# Altium PCB 船主控pcb.pcbdoc
Units mil, origin at the board's own origin, x right, y up, seen from the top; angles counter-clockwise.
Board outline 4146.85 x 4589.53 mil, 2 copper layers (Top Layer, Bottom Layer); 123 components, 77 nets, 392 pads, 117 vias.
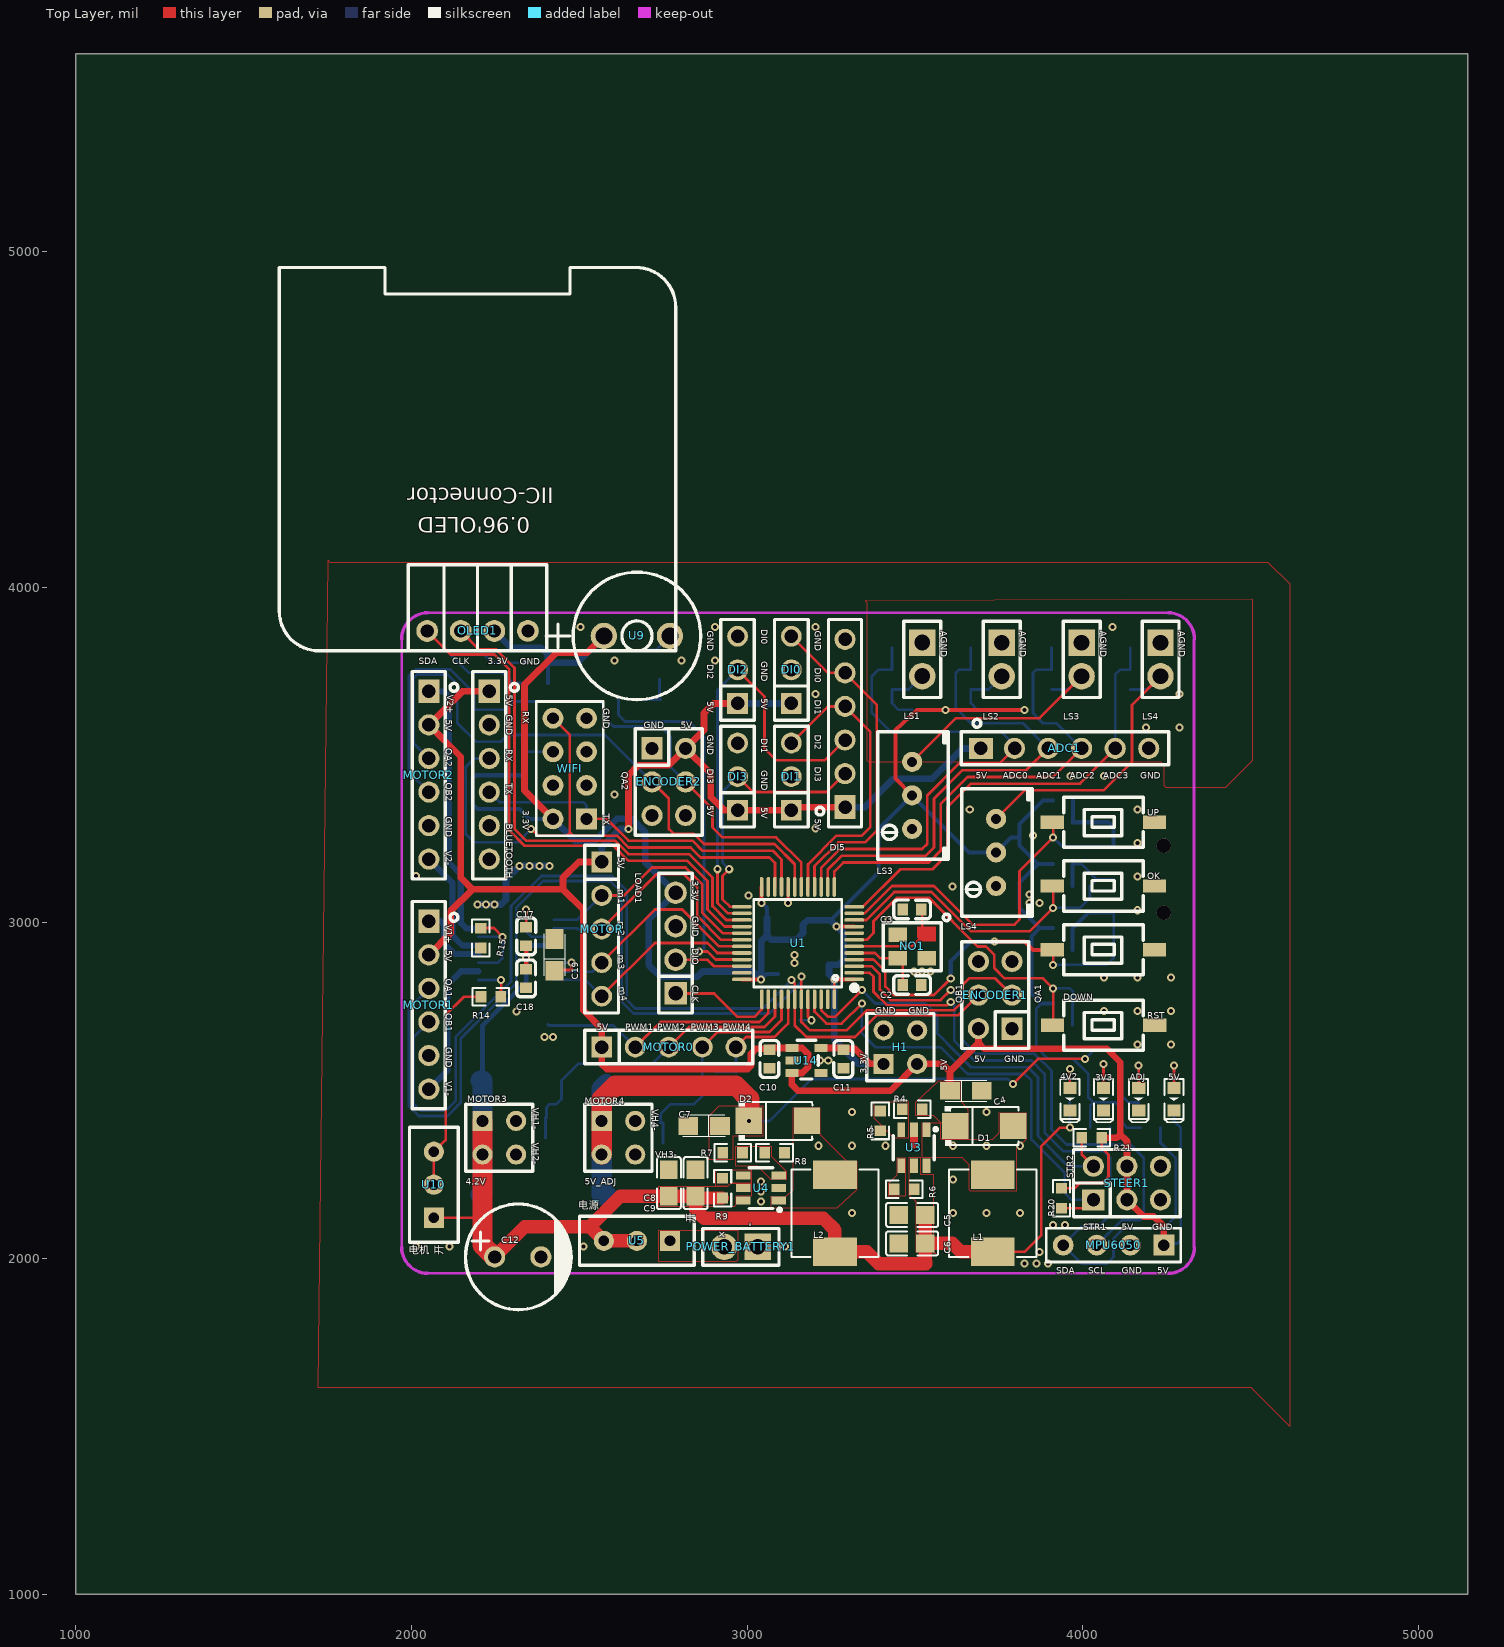
[diagram p0: Top Layer view]
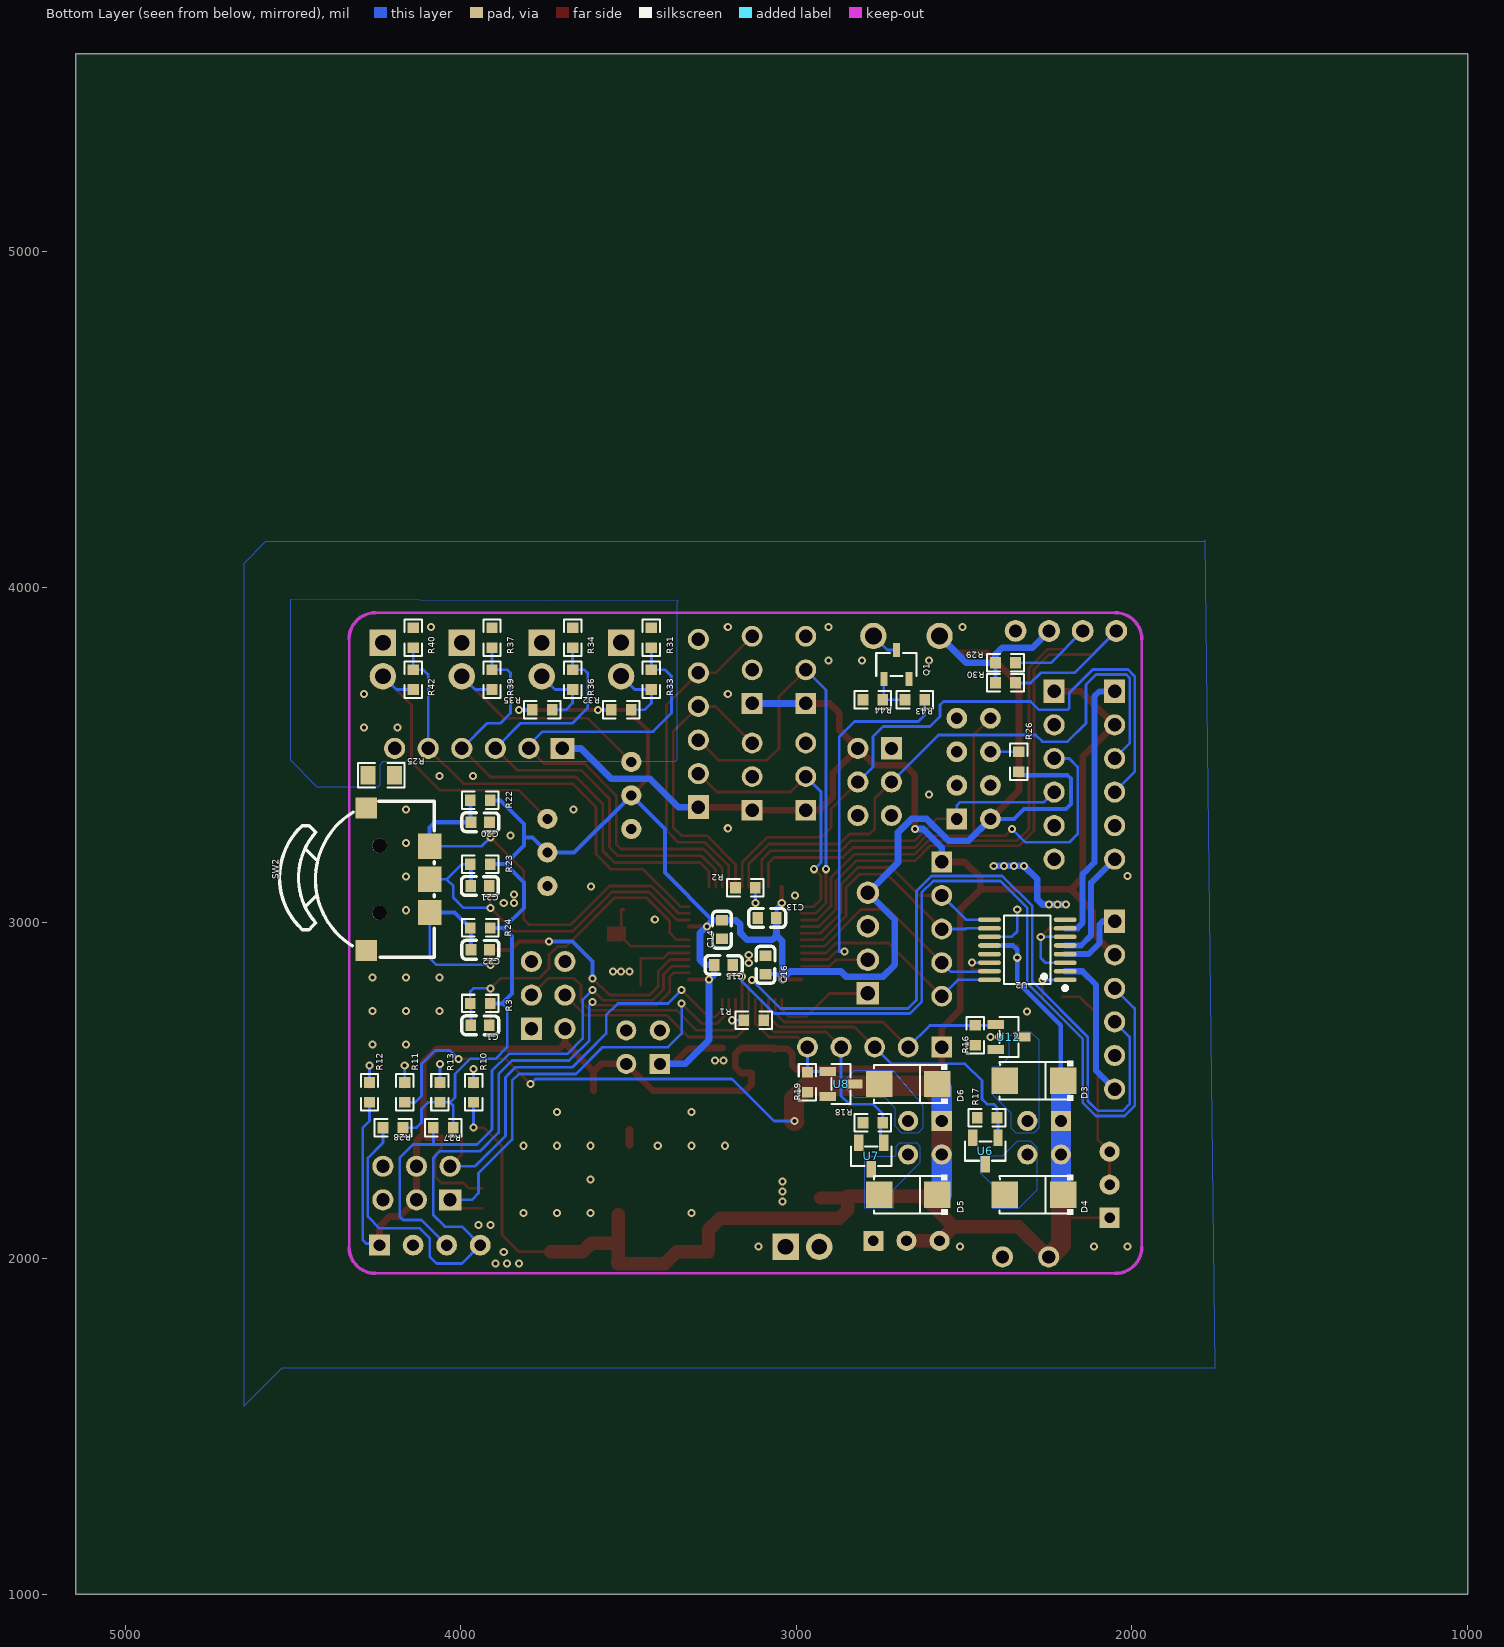
[diagram p1: Bottom Layer view, seen from below]

## Layer stack, top to bottom
Top Layer: signal copper (thickness not stored)
Dielectric: dielectric 12.6, FR-4, Dk 4.8
Bottom Layer: signal copper (thickness not stored)

## Board outline
5146.85,1000 1000,1000 1000,5589.53 5146.85,5589.53

## Components (designator, comment, footprint, x,y, rotation, side; value= is the part's Value field where it differs from the comment)
3V3 "LED-0603_R" LED0603_RED 4061.85,2475 r270 top
4V2 "LED-0603_R" LED0603_RED 3961.85,2475 r270 top
5V "LED-0603_R" LED0603_RED 4271.85,2475 r270 top
ADC1 "HDR-F_2.54_1x6P" HDR-TH_6P-P2.54-V-F 3946.85,3520 r0 top
ADJ "LED-0603_R" LED0603_RED 4166.85,2475 r270 top
BLUETOOTH "HDR-F_2.54_1x6P" HDR-TH_6P-P2.54-V-F 2231.85,3440 r270 top
C1 "100nF" C0603#1 3942.04,2695 r180 bottom
C2 "100nF" C0603#2 3491.24,2815 r180 top
C3 "100nF" C0603#2 3491.85,3040 r0 top
C4 "22uF" CASE-A_3216 3651.85,2500 r0 top
C5 "10uF" C0805 3491.85,2130 r180 top
C6 "10uF" C0805 3491.85,2045 r180 top
C7 "22uF" CASE-A_3216 2871.85,2395 r180 top
C8 "10uF" C0805 2846.85,2225 r90 top
C9 "10uF" C0805 2766.85,2225 r90 top
C10 "1uF" C0603#2 3066.85,2595 r90 top
C11 "1uF" C0603#2 3286.85,2595 r90 top
C12 "1000uF" CAP-TH_BD8.0-P3.50-D0.6-FD 2316.85,2005 r0 top
C13 "100nF" C0603#1 3086.85,3015 r0 bottom
C14 "100nF" C0603#1 3221.85,2980 r270 bottom
C15 "100nF" C0603#1 3216.85,2875 r180 bottom
C16 "100nF" C0603#1 3091.85,2875 r90 bottom
C17 "10nF" C0603#2 2341.85,2960 r270 top
C18 "10uF" C0603#2 2341.85,2835 r90 top
C19 "22uF" CASE-A_3216 2426.85,2905 r90 top
C20 "100nF" C0603#1 3941.85,3300 r180 bottom
C21 "100nF" C0603#1 3942.46,3110 r0 bottom
C22 "100nF" C0603#1 3941.85,2920 r180 bottom
D1 "SS14" SMA_L4.3-W2.6-LS5.2-RD#1 3706.85,2395 r0 top
D2 "SS14" SMA_L4.3-W2.6-LS5.2-RD#1 3091.85,2410 r0 top
D3 "SS14" SMA_L4.3-W2.6-LS5.2-RD#2 2291.85,2530 r180 bottom
D4 "SS14" SMA_L4.3-W2.6-LS5.2-RD#2 2291.85,2190 r180 bottom
D5 "SS14" SMA_L4.3-W2.6-LS5.2-RD#2 2666.85,2190 r180 bottom
D6 "SS14" SMA_L4.3-W2.6-LS5.2-RD#2 2666.85,2520 r180 bottom
DI0 "HDR-F_2.54_1x3P" HDR-TH_3P-P2.54-V-F 3131.85,3754.05 r90 top
DI1 "HDR-F_2.54_1x3P" HDR-TH_3P-P2.54-V-F 3131.85,3435.95 r90 top
DI2 "HDR-F_2.54_1x3P" HDR-TH_3P-P2.54-V-F 2971.85,3754.05 r90 top
DI3 "HDR-F_2.54_1x3P" HDR-TH_3P-P2.54-V-F 2971.85,3435.95 r90 top
DI5 "HDR-F_2.54_1x6P" HDR-TH_6P-P2.54-V-F 3291.85,3595 r90 top
DOWN "微动开关贴片" SW-SMD_L6.0-W3.7-LS8.0 4061.85,2920 r0 top
ENCODER1 "HDR-F_2.54_2x3" HDR-TH_6P-P2.54-V-F-R2-C3-S2.54 3739.45,2785 r90 top
ENCODER2 "HDR-F_2.54_2x3" HDR-TH_6P-P2.54-V-F-R2-C3-S2.54 2766.85,3420 r270 top
H1 "HDR-F-2.54_2x2" HDR-F-2.54_2X2 3456.86,2630 r0 top
L1 "47uH" IND-SMD_L7.1-W6.6 3731.85,2135 r270 top
L2 "47uH" IND-SMD_L7.1-W6.6 3261.85,2135 r270 top
LOAD1 "HDR-F_2.54_1x4P" HDR-TH_4P-P2.54-V-F 2786.85,2940 r90 top
LS1 "HDR-F_2.54_1x2P" HDR-TH_2P-P2.54-V-F 3522.04,3785.2 r270 top
LS2 "HDR-F_2.54_1x2P" HDR-TH_2P-P2.54-V-F 3758.65,3785 r270 top
LS3 "HDR-F_2.54_1x2P" HDR-TH_2P-P2.54-V-F 3996.85,3785 r270 top
LS3 "3296W-2K" RES-ADJ-TH_3296W 3491.85,3380 r180 top
LS4 "3296W-2K" RES-ADJ-TH_3296W 3741.85,3210 r180 top
LS4 "HDR-F_2.54_1x2P" HDR-TH_2P-P2.54-V-F 4231.85,3785 r270 top
MOTOR "HDR-F_2.54_1x5P" HDR-TH_5P-P2.54-V-F 2566.85,2981.73 r270 top
MOTOR0 "HDR-F_2.54_1x5P" HDR-TH_5P-P2.54-V-F 2766.85,2630 r0 top
MOTOR1 "HDR-F_2.54_1x6P" HDR-TH_6P-P2.54-V-F 2051.85,2755 r270 top
MOTOR2 "HDR-F_2.54_1x6P" HDR-TH_6P-P2.54-V-F 2051.85,3440 r270 top
MOTOR3 "HDR-F-2.54_2x2" HDR-F-2.54_2X2 2261.85,2360 r270 top
MOTOR4 "HDR-F-2.54_2x2" HDR-F-2.54_2X2 2616.85,2360 r270 top
MPU6050 "HDR-F-2.54_1x4" HDR-F-2.54_1X4 4091.85,2040 r180 top
NO1 "8MHz" 3225G-4P晶振 3491.85,2930 r180 top
OK "微动开关贴片" SW-SMD_L6.0-W3.7-LS8.0 4061.85,3110 r0 top
OLED1 "0.96OLED模块_4P" 0.96OLED_4P 2196.85,3870 r180 top
POWER_BATTERY1 "HDR-F_2.54_1x2P" HDR-TH_2P-P2.54-V-F 2981.85,2035 r180 top
Q1 "S8050H" SOT-23-3_L3.0-W1.7-P0.95-LS2.9-BR 2701.85,3770 r90 bottom
R1 "10K" R0603#1 3126.85,2710 r0 bottom
R2 "10K" R0603#1 3151.85,3105 r0 bottom
R3 "10K" R0603#1 3941.66,2760 r0 bottom
R4 "3K" R0603#2 3491.85,2445 r0 top
R5 "2K" R0603#2 3396.85,2410 r270 top
R6 "10K" R0603#2 3468.38,2205.96 r180 top
R7 "1K" R0603#2 2956.85,2315 r180 top
R8 "3K" R0603#2 3081.85,2315 r0 top
R9 "10K" R0603#2 2926.85,2210 r90 top
R10 "4.7K" R0603#1 3961.85,2495 r90 bottom
R11 "4.7K" R0603#1 4166.85,2495 r90 bottom
R12 "4.7K" R0603#1 4271.85,2495 r90 bottom
R13 "4.7K" R0603#1 4061.85,2495 r90 bottom
R14 "20K" R0603#2 2236.85,2780 r180 top
R15 "0.2R" R0603#2 2206.85,2955 r90 top
R16 "10K" R0603#1 2466.85,2665 r270 bottom
R17 "10K" R0603#1 2431.85,2420 r0 bottom
R18 "10K" R0603#1 2771.85,2405 r0 bottom
R19 "10K" R0603#1 2966.85,2525 r270 bottom
R20 "1K" R0603#2 3936.85,2180 r90 top
R21 "1K" R0603#2 4026.85,2360 r0 top
R22 "10K" R0603#1 3941.66,3365 r0 bottom
R23 "10K" R0603#1 3941.66,3175 r0 bottom
R24 "10K" R0603#1 3941.66,2985 r0 bottom
R25 "0" R0805 4236.85,3440 r0 bottom
R26 "4.7K" R0603#1 2336.85,3480 r90 bottom
R27 "4.7K" R0603#1 4051.85,2390 r180 bottom
R28 "4.7K" R0603#1 4201.85,2390 r180 bottom
R29 "4.7K" R0603#1 2376.85,3775 r0 bottom
R30 "4.7K" R0603#1 2376.85,3715 r0 bottom
R31 "1K" R0603#1 3431.85,3850 r90 bottom
R32 "47K" R0603#1 3521.85,3635 r0 bottom
R33 "1K" R0603#1 3431.85,3725 r270 bottom
R34 "1K" R0603#1 3666.85,3850 r90 bottom
R35 "47K" R0603#1 3756.85,3635 r0 bottom
R36 "1K" R0603#1 3666.85,3725 r270 bottom
R37 "1K" R0603#1 3906.85,3850 r90 bottom
R39 "1K" R0603#1 3906.85,3725 r270 bottom
R40 "1K" R0603#1 4141.85,3850 r90 bottom
R42 "1K" R0603#1 4141.85,3725 r270 bottom
R43 "1K" R0603#1 2646.85,3665 r180 bottom
R44 "1K" R0603#1 2771.85,3665 r0 bottom
RST "微动开关贴片" SW-SMD_L6.0-W3.7-LS8.0 4062.04,2695 r0 top
STEER1 "HDR-F_2.54_2x3" HDR-TH_6P-P2.54-V-F-R2-C3-S2.54 4131.85,2225 r0 top
SW2 "K1-1502SA-02" KEY-SMD_K1-1502SA-02 4186.85,3130 r270 bottom
U1 "STM32F103C8T6" LQFP-48_L7.0-W7.0-P0.50-LS9.0-BL 3151.85,2940 r90 top
U2 "DRV8833PW_C3681295" TSSOP-16_L5.0-W4.4-P0.65-LS6.4-BL 2311.85,2920 r270 bottom
U3 "SX1308" SOT-23-6_L2.9-W1.6-P0.95-LS2.8-BR 3496.86,2329.99 r90 top
U4 "SX1308" SOT-23-6_L2.9-W1.6-P0.95-LS2.8-BR 3041.85,2210 r0 top
U5 "KH-SS12D01-G3-5.0" SW-TH_KH-SS12D01-G3-5.0 2671.85,2052.72 r180 top
U6 "AO3416" SOT-23-3_L2.9-W1.3-P1.90-LS2.4-BR 2436.85,2320 r270 bottom
U7 "AO3416" SOT-23-3_L2.9-W1.3-P1.90-LS2.4-BR 2776.85,2305 r270 bottom
U8 "AO3416" SOT-23-3_L2.9-W1.3-P1.90-LS2.4-BR 2866.85,2520 r180 bottom
U9 "3.3V 小蜂鸣器" 3.3V小蜂鸣器 2671.85,3855 r90 top
U10 "KH-SS12D01-G3-5.0" SW-TH_KH-SS12D01-G3-5.0 2066.85,2220 r90 top
U12 "AO3416" SOT-23-3_L2.9-W1.3-P1.90-LS2.4-BR 2366.85,2660 r180 bottom
U14 "TPRT9013" SOT-23-5_L2.9-W1.6-P0.95-LS2.8-BL 3176.85,2590 r270 top
UP "微动开关贴片" SW-SMD_L6.0-W3.7-LS8.0 4061.85,3300 r0 top
WIFI "HDR-M-2.54_2x4" HDR-M-2.54_2X4 2471.85,3460 r90 top

## Footprints (in the part's own frame and the unit in brackets; to place one, negate y for a bottom-side part, rotate by r counter-clockwise, add the part's x,y. Pads: shape width x height; smd on the part's side, far side on the other; paste and mask are expansions set on the pad)
0.96OLED_4P [mm]
  round 1.65 hole 1 paste+0 mask+0.051: 1(-3.81,-0.001) 2(-1.27,0.002) 3(1.27,0.002) 4(3.81,0.002)
  silkscreen extent -15,-27.5 15,1.5
3.3V小蜂鸣器 [mm]
  round 2 hole 1.3 paste+0 mask+0.102: 1(0,2.5) 2(0,-2.5)
  silkscreen extent -4.82,-4.83 4.82,6.86
3225G-4P晶振 [mm]
  rect 1.4x1.1 smd paste+0 mask+0.102: 2(1.1,-0.9) 3(1.1,0.9) 4(-1.1,0.9)
  Top Layer region: -1.8,-0.4 -0.7,-0.4 -0.4,-0.7 -0.4,-1.5 -1.8,-1.5
  silkscreen extent -2.85,-2.45 2.2,1.85
C0603#1 [mm]
  rect 0.8x0.9 smd paste+0 mask+0.051: 1(0.7,0) 2(-0.7,0)
  silkscreen extent -1.39,-0.72 1.41,0.71
C0603#2 [mm]
  rect 0.8x0.9 smd paste+0 mask+0.051: 1(-0.7,0) 2(0.7,0)
  silkscreen extent -1.41,-0.71 1.39,0.72
C0805 [mm]
  rect 1.41x1.35 smd paste-100 mask+0.051: 1(-1,0) 2(1,0)
  silkscreen extent -1.96,-0.9 1.96,0.9
CAP-TH_BD8.0-P3.50-D0.6-FD [mm]
  round 1.6 hole 1 paste+0 mask+0.051: 1(-1.75,0) 2(1.75,0)
  silkscreen extent -3.96,-4 4.04,4
CASE-A_3216 [mil]
  rect 59.05x53.5 smd paste+0 mask+2: 1(-47.25,0) 2(47.24,0)
  silkscreen extent -63,-32 63,32
HDR-F-2.54_1X4 [mil]
  rect 62x62 hole 35 paste+0 mask+2: 1(-150,0)
  round 62 hole 35 paste+0 mask+2: 2(-50,0) 3(50,0) 4(150,0)
  silkscreen extent -200,-50 200,50
HDR-F-2.54_2X2 [mil]
  rect 60x60 hole 36 paste+0 mask+2: 1(-50,-50)
  round 60 hole 36 paste+0 mask+2: 2(-50,50) 3(50,-50) 4(50,50)
  silkscreen extent -100,-100 100,100
HDR-M-2.54_2X4 [mil]
  rect 62x62 hole 35 paste+0 mask+2: 1(-150,-50)
  round 62 hole 35 paste+0 mask+2: 2(-150,50) 3(-50,-50) 4(-50,50) 5(50,-50) 6(50,50) 7(150,-50) 8(150,50)
  silkscreen extent -200,-100 200,100
HDR-TH_2P-P2.54-V-F [mm]
  rect 2x2 hole 1.2 paste+0 mask+0.051: 1(-1.27,0)
  round 2 hole 1.2 paste+0 mask+0.051: 2(1.27,0)
  silkscreen extent -2.88,-1.39 2.88,1.4
HDR-TH_3P-P2.54-V-F [mil]
  rect 62x62 hole 40.16 paste+0 mask+2: 1(-100,0)
  round 62 hole 40.16 paste+0 mask+2: 2(0,0) 3(100,0)
  silkscreen extent -150,-50 150,50
HDR-TH_4P-P2.54-V-F [mm]
  rect 1.7x1.7 hole 1.1 paste+0 mask+0.051: 1(-3.81,0)
  round 1.7 hole 1.1 paste+0 mask+0.051: 2(-1.27,0) 3(1.27,0) 4(3.81,0)
  silkscreen extent -5.29,-1.27 5.29,1.27
HDR-TH_5P-P2.54-V-F [mil]
  rect 62x62 hole 40.16 paste+0 mask+2: 1(-200,0)
  round 62 hole 40.16 paste+0 mask+2: 2(-100,0) 3(0,0) 4(100,0) 5(200,0)
  silkscreen extent -250,-50 250,50
HDR-TH_6P-P2.54-V-F [mm]
  rect 1.8x1.6 hole 1.02 paste+0 mask+0.051: 1(-6.35,0)
  round 1.6 hole 1.02 paste+0 mask+0.051: 2(-3.81,0) 3(-1.27,0) 4(1.27,0) 5(3.81,0) 6(6.35,0)
  silkscreen extent -7.85,-1.25 7.85,2.2
HDR-TH_6P-P2.54-V-F-R2-C3-S2.54 [mm]
  rect 1.7x1.6 hole 1 paste+0 mask+0.051: 1(-2.54,-1.27)
  round 1.6 hole 1 paste+0 mask+0.051: 2(-2.54,1.27) 3(0,-1.27) 4(0,1.27) 5(2.54,-1.27) 6(2.54,1.27)
  silkscreen extent -4.04,-2.54 4.04,2.54
IND-SMD_L7.1-W6.6 [mm]
  rect 2.15x3.32 smd paste+0 mask+0.051: 1(-2.913,0) 2(2.913,0)
  silkscreen extent -3.3,-3.3 3.3,3.3
KEY-SMD_K1-1502SA-02 [mm]
  rect 1.9x1.8 smd paste+0 mask+0.051: 1(2.5,2.4) 2(-2.5,2.4) T(0,2.4)
  rect 1.6x1.6 smd paste+0 mask+0.051: 3(5.4,-2.4) C(-5.4,-2.4)
  round 1.1 hole 1.1 unplated paste+0: ""(-2.54,-1.4) ""(2.54,-1.4)
  silkscreen extent -5.9,-8.97 5.9,2.75
LED0603_RED [mm]
  rect 0.9x1 smd paste+0 mask+0.051: 1(-0.85,0) 2(0.85,0)
  silkscreen extent -1.54,-0.73 1.75,0.73
LQFP-48_L7.0-W7.0-P0.50-LS9.0-BL [mm]
  oval 0.27x1.5 smd paste+0 mask+0.05: 1(-2.75,-4.25) 2(-2.25,-4.25) 3(-1.75,-4.25) 4(-1.25,-4.25) 5(-0.75,-4.25) 6(-0.25,-4.25) 7(0.25,-4.25) 8(0.75,-4.25) 9(1.25,-4.25) 10(1.75,-4.25) 11(2.25,-4.25) 12(2.75,-4.25) 25(2.75,4.25) 26(2.25,4.25) 27(1.75,4.25) 28(1.25,4.25) 29(0.75,4.25) 30(0.25,4.25) 31(-0.25,4.25) 32(-0.75,4.25) 33(-1.25,4.25) 34(-1.75,4.25) 35(-2.25,4.25) 36(-2.75,4.25)
  oval 1.5x0.27 smd paste+0 mask+0.05: 13(4.25,-2.75) 14(4.25,-2.25) 15(4.25,-1.75) 16(4.25,-1.25) 17(4.25,-0.75) 18(4.25,-0.25) 19(4.25,0.25) 20(4.25,0.75) 21(4.25,1.25) 22(4.25,1.75) 23(4.25,2.25) 24(4.25,2.75) 37(-4.25,2.75) 38(-4.25,2.25) 39(-4.25,1.75) 40(-4.25,1.25) 41(-4.25,0.75) 42(-4.25,0.25) 43(-4.25,-0.25) 44(-4.25,-0.75) 45(-4.25,-1.25) 46(-4.25,-1.75) 47(-4.25,-2.25) 48(-4.25,-2.75)
  silkscreen extent -3.59,-4.46 3.3,3.34
R0603#1 [mil]
  rect 31.75x34.02 smd paste-3937.01 mask+2: 1(29.65,0) 2(-29.66,0)
  silkscreen extent -55,-26 55,26
R0603#2 [mil]
  rect 31.75x34.02 smd paste-3937.01 mask+2: 1(-29.66,0) 2(29.65,0)
  silkscreen extent -55,-26 55,26
R0805 [mil]
  rect 44.59x54.21 smd paste-3937.01 mask+2: 1(39.37,0) 2(-39.37,0)
  silkscreen extent -69,-36 69,36
RES-ADJ-TH_3296W [mil]
  round 60 hole 30 paste+0 mask+2: 1(0,100.01) 2(0,0.01) 3(0,-99.99)
  silkscreen extent -108,-190 102,190
SMA_L4.3-W2.6-LS5.2-RD#1 [mm]
  rect 2x2 smd paste+0 mask+0.051: 1(-2.2,0) 2(2.2,0)
  silkscreen extent -2.98,-1.5 2.6,1.5
SMA_L4.3-W2.6-LS5.2-RD#2 [mm]
  rect 2x2 smd paste+0 mask+0.051: 1(2.2,0) 2(-2.2,0)
  silkscreen extent -2.6,-1.5 2.98,1.5
SOT-23-3_L2.9-W1.3-P1.90-LS2.4-BR [mm]
  rect 1.25x0.7 smd paste+0 mask+0.051: 1(-1,0.95) 2(-1,-0.95) 3(1,0)
  silkscreen extent -0.73,-1.53 0.73,1.53
SOT-23-3_L3.0-W1.7-P0.95-LS2.9-BR [mm]
  rect 1.037x0.532 smd paste+0 mask+0.051: 1(-1.101,0.95) 2(-1.101,-0.95) 3(1.101,0)
  silkscreen extent -0.86,-1.53 0.86,1.53
SOT-23-5_L2.9-W1.6-P0.95-LS2.8-BL [mm]
  rect 0.6x1 smd paste+0 mask+0.05: 1(-0.95,-1.1) 2(0,-1.1) 3(0.95,-1.1) 4(0.95,1.1) 5(-0.95,1.1)
  silkscreen extent -1.52,-0.7 1.4,0.89
SOT-23-6_L2.9-W1.6-P0.95-LS2.8-BR [mm]
  rect 1.1x0.6 smd paste+0 mask+0.051: 1(1.35,-0.95) 2(1.35,0) 3(1.35,0.95) 4(-1.35,0.95) 5(-1.35,0) 6(-1.35,-0.95)
  silkscreen extent -0.9,-1.78 1.52,1.55
SW-SMD_L6.0-W3.7-LS8.0 [mm]
  rect 1.75x1 smd paste+0 mask+0.051: 1(-3.875,0) 2(3.875,0)
  silkscreen extent -3,-1.9 3,1.9
SW-TH_KH-SS12D01-G3-5.0 [mil]
  rect 60x60 hole 31.5 paste+0 mask+2: 1(-98.43,0)
  round 60 hole 31.5 paste+0 mask+2: 2(0,0) 3(98.42,0)
  silkscreen extent -171,-73 171,73
TSSOP-16_L5.0-W4.4-P0.65-LS6.4-BL [mm]
  oval 0.343x1.731 smd paste+0 mask+0.051: 1(2.275,2.866) 2(1.625,2.866) 3(0.975,2.866) 4(0.325,2.866) 5(-0.325,2.866) 6(-0.975,2.866) 7(-1.625,2.866) 8(-2.275,2.866) 9(-2.275,-2.866) 10(-1.625,-2.866) 11(-0.975,-2.866) 12(-0.325,-2.866) 13(0.325,-2.866) 14(0.975,-2.866) 15(1.625,-2.866) 16(2.275,-2.866)
  silkscreen extent -2.58,-1.77 3.05,3.02

## Via types
v1: diameter 24, hole 12, Top Layer to Bottom Layer, tented both sides, 117 vias

## Nets (pads, with @x,y where several pads share a name; then routed paths per layer and width w, separated by ;. In a path a pad name is that pad's centre, name@x,y a point inside that pad or via, vN(x,y) a via of type N, cw(c..) or ccw(c..) an arc to the next point about the centre after c; other vN are vias at no path point)
3.3V: C11.2 C13.2 C14.2 C15.2 C16.2 H1.1 LOAD1.4 LS3.2@3491.85,3379.99 LS4.2@3741.85,3209.99 OLED1.2 R3.2 R13.2 R22.2 R23.2 R24.2 R26.2 R27.1 R28.1 R29.1 R30.1 R32.1 R35.1 U1.1 U1.9 U1.24 U1.36 U1.48 U9.1 U14.5 WIFI.2 | length 7644.4
  Top Layer w8: U1.48 v1(3260.15,2831.7)
  Top Layer w12: U1.36 v1(3041.85,2831.7) ; v1(3043.55,3060) U1.24@3043.55,3107.3 ; v1(3260.15,2831.7) U1.1@3319.15,2831.7 ; v1(3266.85,2990) 3318.38,2990 U1.9 ; LS3.2@3491.85,3380 3441.85,3430 3441.85,3575 3506.85,3635 v1(3591.15,3635) v1(3826.85,3635)
  Top Layer w20: WIFI.2 2336.85,3395 2336.85,3710 2431.85,3805 2523.45,3805 U9.1 ; U14.5@3220.15,2627.4 3286.85,2627.4 C11.2 3289.25,2625 3321.85,2625 3366.85,2580 H1.1@3406.85,2580
  Bottom Layer w8: 3876.85,2760 3861.85,2745 3861.85,2630 3896.85,2595 3971.85,2595 4016.85,2550 4016.85,2480 4031.85,2465 ; R27.1@4022.15,2390 4022.15,2455.3 4031.85,2465 ; R28.1@4172.15,2390 4131.85,2390 4116.85,2405 4116.85,2445 4096.85,2465 R13.2 4031.85,2465
  Bottom Layer w12: R26.2 2336.85,3440 2191.85,3440 2181.85,3430 2181.85,3355 2196.85,3340 2321.85,3340 2351.85,3310 WIFI.2 ; R30.1 R29.1 ; v1(3041.85,2831.7) 3057.59,2847.44 C16.2 ; v1(3043.55,3060) 3059.29,3044.26 C13.2 ; 3249.25,3007.6 3391.85,3150.1 3391.85,3280 3491.85,3380 3661.85,3210 3741.85,3210 3786.32,3254.48 ; R32.1 v1(3591.15,3635) ; 3786.35,3254.5 3811.85,3254.3 ; R35.1 v1(3826.85,3635) ; R3.2@3911.95,2760 3876.85,2760 3846.85,2790 3846.85,2960 3871.85,2985 ; R24.2@3911.95,2985 3871.85,2985 ; R23.2@3911.95,3175 3866.85,3175 ; R22.2@3911.95,3365 3881.85,3365 3811.85,3295 3811.85,3230 3866.85,3175 ; 3866.85,3175 3811.85,3120 3811.85,3045 3871.85,2985
  Bottom Layer w20: OLED1.2@2246.85,3869.95 2296.8,3820 2386.85,3820 2406.51,3800.34 R29.1 2493.43,3775 U9.1 ; WIFI.2 2486.85,3245 2546.85,3245 2611.85,3310 2656.85,3310 2696.85,3270 2696.85,3180 LOAD1.4 2706.85,3010 2706.85,2875 2741.85,2840 2851.85,2840 2866.85,2855 3018.55,2855 v1(3041.85,2831.7) 3041.85,2945 3059.25,2962.4 ; C13.2@3059.25,3015 3059.25,2962.4 ; C15.2 3244.41,2847.44 v1(3260.15,2831.7) 3260.15,2651.7 3331.85,2580 H1.1 ; C15.2 3271.85,2875 3286.85,2890 3286.85,2970 v1(3266.85,2990) 3249.29,3007.56 C14.2 3179.41,3007.56 3166.85,2995 3166.85,2970 3146.85,2950 3071.65,2950 3059.25,2962.4
4.2V: C5.1 C6.1 C8.1 C9.1 C12.1 C17.2 C18.2 D3.1 D4.1 L1.2 L2.2 MOTOR3.1 MOTOR3.3 R6.1 R9.1 R10.2 U2.12 U3.5 U4.5 U5.2 U5.3 U10.1 | length 4354.3
  Top Layer w8: U10.1 2211.85,2121.3 ; L1.2 3732.17,2020 3826.85,2020 3876.85,2070 3876.85,2335 3931.85,2390 v1(3961.85,2390)
  Top Layer w14: C18.2 v1(2341.85,2896.32) C17.2
  Top Layer w40: C12.1 2337.95,2095 2531.15,2095 ; U5.3 U5.2 ; U5.3 2531.15,2095 ; C9.1 2621.75,2185.6 2531.15,2095 ; C9.1 C8.1 2852.14,2180.34 R9.1 ; C8.1 2846.85,2145 2871.85,2120 3226.85,2120 3261.85,2085 L2.2 3356.85,2020 3391.85,1985 3531.85,1985 3531.25,2004.4 C6.1 ; C5.1 C6.1 3611.85,2045 3636.53,2020.32 L1.2
  Top Layer w60: MOTOR3.1 MOTOR3.3 2211.85,2040 2246.85,2005 C12.1
  Bottom Layer w8: v1(3961.85,2390) R10.2
  Bottom Layer w14: MOTOR3.1 2211.85,2695 2341.85,2825 2341.85,2862.56 2341.85,2920 2354.65,2932.8 U2.12@2424.65,2932.8
  Bottom Layer w60: D4.1 2211.85,2190 MOTOR3.3 MOTOR3.1 2211.85,2530 D3.1
5V: ADC1.1 BLUETOOTH.1 C4.1 C10.2 D1.1 DI0.1 DI1.1 DI2.1 DI3.1 DI5.1 ENCODER1.2 ENCODER2.2 H1.3 MOTOR0.1 MOTOR1.2 MOTOR2.2 MOTOR.1 MPU6050.1 R4.2 R12.2 R20.2 R21.2 STEER1.3 STEER1.4 U14.1 U14.3 | length 7414
  Top Layer w8: R20.2 3976.55,2209.7 3991.85,2225 4056.85,2225 4076.85,2245 4076.85,2310 4056.85,2330 R21.2
  Top Layer w20: MOTOR1.2 2116.85,2970 2116.85,3035 2181.85,3100 ; BLUETOOTH.1 2151.85,3690 MOTOR2.2 2146.85,3495 2146.85,3135 2181.85,3100 ; MOTOR.1 2498.55,3181.7 2451.85,3135 2451.85,3100 ; v1(2646.85,3280) 2646.85,3440 2676.85,3470 2766.85,3470 ENCODER2.2 ; DI3.1 2930.95,3335.9 2891.85,3375 2891.85,3445 ENCODER2.2 ; DI3.1 DI1.1 3140.9,3345 DI5.1 ; DI2.1 2900.9,3654.05 2871.85,3625 2871.85,3575 ENCODER2.2 ; C4.1 3604.65,2557.2 ; ENCODER1.2 3689.45,2642 ; R21.2 4101.85,2360 4111.85,2370 ; MPU6050.1 4241.85,2095 4211.85,2125 4181.85,2125 STEER1.3 STEER1.4 4131.85,2350 4111.85,2370 ; 2181.85,3100 2451.85,3100 ; 2451.85,3100 2511.85,3040 2511.85,2740 2566.85,2685 MOTOR0.1 2566.85,2580 2581.85,2565 3001.85,2565 3011.85,2575 3011.85,2610 3026.85,2625 3064.45,2625 C10.2 3066.85,2627.4 U14.1 3164.45,2627.4 3181.85,2610 3181.85,2570 3164.45,2552.6 U14.3 3133.54,2518.31 3151.85,2500 3426.86,2500 H1.3 3581.85,2580 3604.65,2557.2 ; 3604.65,2557.2 3689.45,2642 ; 3689.45,2642 3706.45,2625 4071.85,2625 4111.85,2585 4111.85,2370
  Bottom Layer w8: MPU6050.1 4246.85,2045 4281.85,2045 4291.85,2055 4291.85,2390 4271.85,2410 R12.2@4271.85,2450.3
  Bottom Layer w20: MOTOR.1 2566.85,3225 2621.85,3280 v1(2646.85,3280) ; DI2.1 DI0.1 ; DI5.1 3351.85,3345 3436.85,3430 3551.85,3430 3641.85,3520 ADC1.1
5V_ADJ: C7.1 D2.1 D5.1 D6.1 MOTOR4.1 MOTOR4.3 R7.2 R11.2 | length 3157
  Top Layer w8: v1(3791.85,2520) 3866.85,2595 v1(4006.85,2595)
  Top Layer w60: MOTOR4.3 MOTOR4.1 2566.85,2475 2606.85,2515 2966.85,2515 3006.85,2475 3006.85,2411.6 v1(3005.25,2410)
  Bottom Layer w8: v1(3791.85,2520) 3776.85,2535 ; v1(4006.85,2595) 4031.85,2620 4076.85,2620 4116.85,2580 4116.85,2485 4136.85,2465 R11.2@4166.85,2465 ; 3066.85,2410 v1(3005.25,2410) 3066.85,2410 ; 3066.85,2410 3191.85,2535 ; 3066.85,2410 3191.85,2535 ; 3191.85,2535 3776.85,2535 ; 3191.85,2535 3776.85,2535
  Bottom Layer w60: MOTOR4.3 2566.85,2190 D5.1 ; MOTOR4.1 2566.85,2506.61 D6.1
ADC0: ADC1.2 R31.2 R33.2 U1.15 | length 1583.2
  Top Layer w8: U1.15@3220.75,3107.3 3220.75,3163.9 3276.85,3220 3521.85,3220 3536.85,3235 3536.85,3380 3631.85,3475 3751.85,3475 ADC1.2
  Bottom Layer w8: R33.2 R31.2 ; R33.2 3392.15,3754.7 3371.85,3735 3371.85,3625 3426.85,3570 3756.85,3570 3796.85,3530 ADC1.2
ADC1: ADC1.3 R34.2 R36.2 U1.14 | length 1486.6
  Top Layer w8: U1.14 3240.45,3158.6 3281.85,3200 3531.85,3200 3556.85,3225 3556.85,3370 3641.85,3455 3831.85,3455 ADC1.3
  Bottom Layer w8: R36.2 R34.2 ; R36.2 3632.15,3754.7 3621.85,3745 3621.85,3640 3666.85,3595 3821.85,3595 ADC1.3
ADC2: ADC1.4 R37.2 R39.2 U1.13 | length 1449.6
  Top Layer w8: U1.13 3260.15,3153.3 3286.85,3180 3541.85,3180 3576.85,3215 3576.85,3355 3656.85,3435 3911.85,3435 ADC1.4
  Bottom Layer w8: R39.2 R37.2 ; R39.2 3862.15,3754.7 3851.85,3745 3851.85,3625 3881.85,3595 3921.85,3595 ADC1.4
ADC3: ADC1.5 R40.2 R42.2 U1.12 | length 1391.7
  Top Layer w8: U1.12@3319.15,3048.3 3345.15,3048.3 3456.85,3160 3551.85,3160 3596.85,3205 3596.85,3345 3666.85,3415 3991.85,3415 ADC1.5
  Bottom Layer w8: ADC1.5 4096.85,3740 4112.15,3754.7 R42.2 ; R42.2 R40.2
AGND: ADC1.6 LS1.1 LS2.1 LS3.1@3996.85,3835 LS4.1@4231.85,3835 R25.1 R31.1 R34.1 R37.1 R40.1
  other v1: 4188.85,3582.05 4288.85,3582.05 4288.85,3682.05 4088.85,3882.05
BEEP: R43.1 U1.33 | length 1119.5
  Top Layer w8: v1(2856.85,2915) 2881.85,2915 2906.05,2890.8 U1.33
  Bottom Layer w8: R43.1@2617.15,3665 2617.15,3619.7 2636.85,3600 2826.85,3600 2871.85,3555 2871.85,2915 v1(2856.85,2915)
D1_2: D1.2 L1.1 U3.1
D2_2: D2.2 L2.1 U4.1
DI0: DI0.3 DI5.5 U1.16 | length 1006
  Top Layer w8: DI0.3 3240.9,3745 DI5.5 3386.85,3650 3386.85,3275 3351.85,3240 3271.85,3240 3201.05,3169.2 U1.16@3201.05,3107.3
DI1: DI1.3 DI5.4 U1.17 | length 894.7
  Top Layer w8: DI1.3 3240.9,3645 DI5.4 3366.85,3570 3366.85,3285 3341.85,3260 3266.85,3260 3181.35,3174.5 U1.17@3181.35,3107.3
DI2: DI2.2 DI5.3 U1.26 | length 1351.2
  Top Layer w8: v1(2911.85,3160) 2911.85,3060 2943.25,3028.6 U1.26 ; DI2.2 3051.85,3674.1 3051.85,3520 3086.85,3485 3231.85,3485 DI5.3
  Bottom Layer w8: v1(2911.85,3160) 2911.85,3694.05 DI2.2
DI3: DI3.2 DI5.2 U1.25 | length 829.6
  Top Layer w8: v1(2946.85,3160) 2926.85,3140 2926.85,3070 2948.55,3048.3 U1.25 ; DI3.2 3017.75,3390 3236.85,3390 DI5.2
  Bottom Layer w8: v1(2946.85,3160) 2926.85,3180 2926.85,3390.9 DI3.2
DOWN: C22.2 DOWN.1 R24.1 SW2.1 U1.4 | length 1461.1
  Top Layer w8: 3411.85,2845 3411.85,2855 ; v1(3606.85,2835) 3556.85,2785 3436.85,2785 3411.85,2810 3411.85,2855 ; DOWN.1@3909.25,2920 3911.85,2917.4 v1(3911.85,2875) ; 3376.05,2890.8 3319.15,2890.8 3376.05,2890.8 ; 3376.05,2890.8 3411.85,2855 ; 3376.05,2890.8 3411.85,2855
  Top Layer w12: v1(3736.85,2945) 3826.85,2945 3851.85,2920 DOWN.1
  Bottom Layer w8: v1(3911.85,2875) 4071.85,2875 4092.35,2895.5 SW2.1@4092.35,3031.6
  Bottom Layer w12: v1(3606.85,2835) 3606.85,2885 3666.85,2945 v1(3736.85,2945) ; C22.2 3969.41,2983.09 R24.1 4017.9,3031.58 SW2.1
GND: 3V3.2 4V2.2 5V.2 ADJ.2 BLUETOOTH.2 C1.1 C2.1 C3.1 C4.2 C5.2 C6.2 C7.2 C8.2 C9.2 C10.1 C11.1 C12.2 C13.1 C14.1 C15.1 C16.1 C18.1 C19.2 C20.1 C21.2 C22.1 DI0.2 DI1.2 DI2.3 DI3.3 DI5.6 DOWN.2 ENCODER1.1 ENCODER2.1 H1.2 H1.4 LOAD1.3 MOTOR1.5 MOTOR2.5 MPU6050.2 NO1.2 NO1.4 OK.2 OLED1.1 POWER_BATTERY1.1 Q1.2 R1.2 R2.1 R5.2 R8.2 R15.1 R16.1 R17.1 R18.1 R19.1 R25.2 R44.1 RST.2 STEER1.5 STEER1.6 SW2.3 SW2.C U1.8 U1.23 U1.35 U1.47 U2.13 U3.2 U4.2 U6.2 U7.2 U8.2 U12.2 U14.2 UP.2 WIFI.7 | length 340.9
  Top Layer w24: 3496.85,2340 U3.2@3496.85,2383.1
  Bottom Layer w20: v1(2196.85,3055) v1(2221.91,3055) v1(2247.7,3055) 2266.85,3055 2281.85,3070 2281.85,3130 v1(2321.85,3170) v1(2411.85,3170)
  other v1: 3826.85,1985 3861.85,1985 3896.85,1985 3871.85,2020 2012.95,2036.09 2112.95,2036.09 2512.95,2036.09 3112.95,2036.09 3911.85,2100 3946.85,2100 3312.95,2136.09 3612.95,2136.09 3712.95,2136.09 3812.95,2136.09 3041.85,2170 3041.85,2200 3041.85,2230 3612.95,2236.09 3212.95,2336.09 3312.95,2336.09 3412.95,2336.09 3612.95,2336.09 3712.95,2336.09 3812.95,2336.09 3312.95,2436.09 3712.95,2436.09 3216.85,2590 3241.85,2590 4163.5,2637.8 4263.5,2637.8 2396.85,2660 2421.85,2660 2312.95,2736.09 4063.5,2737.8 4163.5,2737.8 4263.5,2737.8 4063.5,2837.8 4163.5,2837.8 4263.5,2837.8 3496.85,2855 3521.85,2855 3546.85,2855 3141.85,2880 3141.85,2905 3421.85,3010 4163.5,3037.8 3841.85,3060 3871.85,3060 3004.35,3082.05 3841.85,3085 3612.08,3108.36 4163.5,3137.8 2012.95,3139.3 2351.85,3170 2381.85,3170 4163.5,3237.8 3851.85,3260 3204.35,3282.05 3663.5,3337.8 4163.5,3337.8 2604.35,3382.05 3963.5,3437.8 4063.5,3437.8 3204.35,3682.05 2604.35,3782.05 2804.35,3782.05 2904.35,3782.05 2504.35,3882.05 2904.35,3882.05 3204.35,3882.05
MOTOR1: MOTOR.2 U1.29 U2.9 | length 755
  Top Layer w8: MOTOR.2 2633.55,3081.7 2716.85,3165 2816.85,3165 2866.85,3115 2866.85,3030 2927.35,2969.5 U1.29
  Bottom Layer w8: U2.9 2494.69,3009.57 MOTOR.2
MOTOR2: MOTOR.3 U1.30 U2.10 | length 760.5
  Top Layer w8: MOTOR.3 2730.15,3145 2811.85,3145 2851.85,3105 2851.85,3020 2922.05,2949.8 U1.30
  Bottom Layer w8: U2.10 U2.10@2425.69,2985 ; U2.10 2492.87,2983.98 2495.12,2981.73 MOTOR.3
MOTOR3: MOTOR.4 U1.31 U2.15 | length 682.4
  Top Layer w8: MOTOR.4 2725.15,3040 2806.85,3040 2916.65,2930.2 U1.31
  Bottom Layer w8: U2.15@2424.65,2856 2425.65,2855 2540.15,2855 MOTOR.4
MOTOR4: MOTOR.5 U1.32 U2.16 | length 657.8
  Top Layer w8: MOTOR.5 2725.15,2940 2881.85,2940 2911.35,2910.5 U1.32
  Bottom Layer w8: U2.16 2518.15,2830.43 MOTOR.5
MPU_SCL: MPU6050.3 R27.2 U1.3 | length 1921.4
  Top Layer w8: v1(3606.85,2800) 3576.85,2770 3426.85,2770 ; 3370.85,2871 3319.15,2871 3370.85,2871 ; 3370.85,2871 3395.75,2846.1 ; 3370.85,2871 3395.75,2846.1 ; 3395.75,2801.1 3395.75,2846.1 ; 3395.75,2801.1 3426.85,2770 ; 3395.75,2801.1 3395.75,2846.1 ; 3395.75,2801.1 3426.85,2770
  Bottom Layer w8: v1(3606.85,2800) 3636.85,2770 3636.85,2655 3681.85,2610 3856.85,2610 3906.85,2560 3906.85,2385 3951.85,2340 4141.85,2340 4181.85,2300 4181.85,2125 4171.85,2115 4116.85,2115 MPU6050.3 MPU6050.3@4041.85,2065 ; 4081.25,2340 R27.2
MPU_SDA: MPU6050.4 R28.2 U1.2 | length 2268.7
  Top Layer w8: U1.2@3319.15,2851.4 3365.45,2851.4 3376.85,2840 3376.85,2795 3416.85,2755 3596.85,2755 v1(3606.85,2765)
  Bottom Layer w8: v1(3606.85,2765) 3616.85,2755 3616.85,2650 3676.85,2590 3846.85,2590 3886.85,2550 3886.85,2375 3941.85,2320 4061.85,2320 4081.85,2300 4081.85,2130 4046.85,2095 3996.85,2095 MPU6050.4 3996.85,1985 4071.85,1985 4091.85,2005 4091.85,2060 4121.85,2090 4241.85,2090 4276.85,2125 4276.85,2300 4231.85,2345 R28.2
OK: C21.1 OK.1 R23.1 SW2.T U1.10 | length 1161.7
  Top Layer w8: U1.10@3319.15,3008.9 3355.75,3008.9 3438.95,3092.1 3549.75,3092.1 3666.85,2975 3841.85,2975 v1(3911.85,3045) 3911.85,3107.44 OK.1
  Bottom Layer w8: v1(3911.85,3045) 3991.85,3045 4021.85,3075 4021.85,3110 4041.85,3130 ; R23.1 3996.85,3175 4041.85,3130 ; SW2.T 4041.85,3130
  Bottom Layer w12: C21.1 3970.02,3173.7 R23.1
OLED_SCL: OLED1.3 R29.2 U1.27 | length 1765
  Top Layer w8: OLED1.3@2146.85,3870 2201.85,3815 2251.85,3815 2306.85,3760 2306.85,3280 2341.85,3245 2606.85,3245 2646.85,3205 2826.85,3205 2896.85,3135 2896.85,3050 2937.95,3008.9 U1.27
  Bottom Layer w8: OLED1.3@2146.85,3869.95 2241.8,3775 R29.2
OLED_SDA: OLED1.4 R30.2 U1.28 | length 1998
  Top Layer w8: OLED1.4@2046.85,3870 2116.85,3800 2246.85,3800 2291.85,3755 2291.85,3275 2336.85,3230 2601.85,3230 2646.85,3185 2821.85,3185 2881.85,3125 2881.85,3040 2932.65,2989.2 U1.28
  Bottom Layer w8: OLED1.4@2046.85,3869.95 2171.8,3745 2271.85,3745 2301.85,3715 R30.2
OSCIN: C2.2 NO1.3 U1.5 | length 230.7
  Top Layer w8: U1.5@3319.15,2910.5 3381.35,2910.5 3397.25,2894.6 NO1.3 ; NO1.3 3463.68,2894.56 C2.2
OSCOUT: C3.2 U1.6 | length 325.9
  Top Layer w8: U1.6@3319.15,2930.2 3492.05,2930.2 3527.25,2965.4 3535.15,2965.4 3521.85,2965.4 3521.85,3040 C3.2@3514.45,3040
PWM1: MOTOR0.2 R16.2 U1.38 U12.1 | length 768.2
  Top Layer w8: MOTOR0.2 2741.85,2705 3036.85,2705 3063.25,2731.4 U1.38@3063.25,2772.7
  Bottom Layer w8: U12.1 2408.96,2694.66 R16.2 2602.19,2694.66 MOTOR0.2
PWM2: MOTOR0.3 R17.2 U1.39 U6.1 | length 970.4
  Top Layer w8: MOTOR0.3 2826.85,2690 3051.85,2690 3082.95,2721.1 U1.39@3082.95,2772.7
  Bottom Layer w8: U6.1 2399.45,2420 R17.2 2402.19,2450.34 2411.85,2460 2431.85,2460 2446.85,2475 2446.85,2530 2496.85,2580 2716.85,2580 MOTOR0.3
PWM3: MOTOR0.4 R18.2 U1.40 U7.1 | length 716.7
  Top Layer w8: MOTOR0.4 2911.85,2675 3066.85,2675 3102.65,2710.8 U1.40
  Bottom Layer w8: U7.1@2749.45,2344.37 2749.45,2405 R18.2 2742.19,2430.34 2771.85,2460 2841.85,2460 2866.85,2485 MOTOR0.4
PWM4: MOTOR0.5 R19.2 U1.41 U8.1 | length 395.2
  Top Layer w8: MOTOR0.5 2996.85,2660 3081.85,2660 3122.35,2700.5 U1.41
  Bottom Layer w8: U8.1 2966.85,2557.4 R19.2 ; R19.2@2966.85,2555 MOTOR0.5
Q1_1: Q1.1 R43.2 R44.2 | length 130.2
  Bottom Layer w8: R43.2 R44.2 ; Q1.1@2739.25,3726.6 2739.25,3665 R44.2@2742.15,3665
QA1: ENCODER1.3 MOTOR1.3 U1.43 | length 3405.9
  Top Layer w8: U1.43 3161.85,2772.84 v1(3161.85,2840) ; U1.43@3161.85,2772.7 3161.85,2705 3186.85,2680 3296.85,2680 3356.85,2740 3616.85,2740 3641.85,2765 3641.85,2815 3661.85,2835 3739.45,2835 ENCODER1.3
  Bottom Layer w8: MOTOR1.3@2031.85,2805 MOTOR1.3 1991.85,2745 1991.85,2455 2021.85,2425 2106.85,2425 2146.85,2465 2146.85,2655 2311.85,2820 2311.85,3044.9 2391.85,3125 2591.85,3125 2626.85,3090 2626.85,2765 2661.85,2730 3066.85,2730 3161.85,2825 v1(3161.85,2840)
QA2: ENCODER2.3 MOTOR2.3 U1.19 | length 1836.3
  Top Layer w8: ENCODER2.3 2766.85,3370 2766.85,3280 2781.85,3265 2841.85,3265 2871.85,3235 3081.85,3235 3142.05,3174.8 U1.19
  Bottom Layer w8: MOTOR2.3 2006.85,3535 2006.85,3730 2016.85,3740 2106.85,3740 2136.85,3710 2136.85,3595 2191.85,3540 2266.85,3540 2286.85,3560 2576.85,3560 ENCODER2.3
QB1: ENCODER1.4 MOTOR1.4 U1.42 | length 3119.6
  Top Layer w8: v1(3131.85,2830) 3141.85,2820 ; U1.42 3142.05,2694.8 3176.85,2660 3321.85,2660 3386.85,2725 3629.45,2725 ENCODER1.4 ; U1.42@3141.85,2772.84 U1.42 U1.42@3141.85,2772.84 ; U1.42@3141.85,2772.84 3141.85,2820 ; U1.42@3141.85,2772.84 3141.85,2820
  Bottom Layer w8: MOTOR1.4 2006.85,2660 2006.85,2460 2026.85,2440 2101.85,2440 2131.85,2470 2131.85,2660 2296.85,2825 2296.85,3050 2386.85,3140 2596.85,3140 2641.85,3095 2641.85,2770 2666.85,2745 3046.85,2745 v1(3131.85,2830)
QB2: ENCODER2.4 MOTOR2.4 U1.18 | length 2011.4
  Top Layer w8: ENCODER2.4 2896.85,3340 2896.85,3285 2926.85,3255 3086.85,3255 3161.65,3180.2 U1.18@3161.65,3107.3
  Bottom Layer w8: MOTOR2.4 1991.85,3450 1991.85,3735 2011.85,3755 2116.85,3755 2186.85,3685 2186.85,3640 2191.85,3635 2276.85,3635 2301.85,3660 2561.85,3660 2571.85,3650 2571.85,3615 2601.85,3585 2741.85,3585 2771.85,3555 2771.85,3465 ENCODER2.4
R1_1: R1.1 U1.44 | length 102.4
  Top Layer w8: U1.44 3181.38,2720.47 v1(3191.85,2710)
  Bottom Layer w8: R1.1 v1(3191.85,2710)
R2_2: R2.2 U1.20 | length 92.5
  Top Layer w8: v1(3121.85,3060) 3121.85,3106.85 U1.20
  Bottom Layer w8: v1(3121.85,3060) R2.2@3122.15,3105
R5_1: R4.1 R5.1 U3.3
R6_2: R6.2 U3.4
R8_1: R7.1 R8.1 U4.3
R9_2: R9.2 U4.4
R10_1: 4V2.1 R10.1 | length 96.9
  Top Layer w8: 4V2.1 v1(3961.85,2565)
  Bottom Layer w8: R10.1 v1(3961.85,2565)
R11_1: ADJ.1 R11.1 | length 116.9
  Top Layer w8: ADJ.1 v1(4166.85,2575)
  Bottom Layer w8: R11.1 v1(4166.85,2575)
R12_1: 5V.1 R12.1 | length 116.9
  Top Layer w8: 5V.1 v1(4271.85,2575)
  Bottom Layer w8: R12.1 v1(4271.85,2575)
R13_1: 3V3.1 R13.1 | length 126.9
  Top Layer w8: 3V3.1 v1(4061.85,2580)
  Bottom Layer w8: R13.1 v1(4061.85,2580)
R26_1: R26.1 WIFI.6 | length 85
  Bottom Layer w8: R26.1 WIFI.6
R33_1: LS1.2 R32.2 R33.1 | length 215.4
  Bottom Layer w8: R32.2@3492.15,3635 3451.85,3635 3431.85,3655 R33.1 3481.55,3695.3 LS1.2
R36_1: LS2.2 R35.2 R36.1 | length 217.1
  Bottom Layer w8: R35.2@3727.15,3635 3686.85,3635 3666.85,3655 R36.1 3718.95,3695.3 LS2.2
R39_1: LS3.2@3996.85,3735 LS3.3 R39.1 | length 717.1
  Top Layer w8: LS3.3 3621.85,3610 3871.85,3610 LS3.2@3996.85,3735
  Bottom Layer w8: R39.1 3957.19,3695.34 LS3.2@3996.85,3735
R42_1: LS4.2@4231.85,3735 LS4.3 R42.1 | length 871.9
  Top Layer w8: LS4.3 3826.85,3395 4061.85,3395 4146.85,3480 4146.85,3650 LS4.2@4231.85,3735
  Bottom Layer w8: R42.1 4191.55,3695.3 LS4.2@4231.85,3735
RESET: C1.2 R3.1 RST.1 U1.7 | length 1075.9
  Top Layer w8: U1.7@3319.15,2949.8 3356.65,2949.8 3376.85,2970 3376.85,3005 3446.85,3075 3541.85,3075 3686.85,2930 3711.85,2930 3736.85,2905 3736.85,2865 3766.85,2835 3881.85,2835 v1(3911.85,2805) 3911.85,2697.36 RST.1
  Bottom Layer w8: v1(3911.85,2805) 3961.85,2805 3971.32,2795.53 R3.1 3969.6,2758.29 C1.2
RX: BLUETOOTH.3 U1.22 WIFI.8 | length 1710.9
  Top Layer w8: v1(2356.85,3280) 2376.85,3260 2461.85,3260 2471.85,3270 ; WIFI.8 2471.85,3560 2471.85,3270 ; U1.22@3082.95,3107.3 3082.95,3178.9 3066.85,3195 2861.85,3195 2831.85,3225 2646.85,3225 2611.85,3260 2481.85,3260 2471.85,3270
  Bottom Layer w8: BLUETOOTH.3 2186.85,3490 2161.85,3465 2161.85,3265 2186.85,3240 2316.85,3240 v1(2356.85,3280)
S$133: 
STEER1: R20.1 STEER1.1 U1.45 | length 1445.3
  Top Layer w8: U1.45@3201.05,2772.7 3201.05,2735.8 3236.85,2700 3281.85,2700 v1(3341.85,2760) ; R20.1 4007.19,2150.34 STEER1.1
  Bottom Layer w8: v1(3341.85,2760) 3341.85,2670 3381.85,2630 3576.85,2630 3656.85,2550 3826.85,2550 3846.85,2530 3846.85,2355 3946.85,2255 3946.85,2195 3966.85,2175 STEER1.1
STEER2: R21.1 STEER1.2 U1.46 | length 1977.8
  Top Layer w8: U1.46 3220.75,2741.1 3241.85,2720 3261.85,2720 v1(3341.85,2800) ; R21.1 3997.19,2309.66 STEER1.2
  Bottom Layer w8: v1(3341.85,2800) 3381.85,2760 3531.85,2760 ; 3396.85,2760 3531.85,2760 ; 3596.85,2640 3666.85,2570 ; 3861.85,2545 3836.85,2570 ; 3531.85,2760 3566.85,2725 3566.85,2670 3666.85,2570 ; 3666.85,2570 3836.85,2570 ; 3666.85,2570 3836.85,2570 ; 3836.85,2570 3866.85,2540 3866.85,2365 ; 3866.85,2365 3956.85,2275 ; 3866.85,2365 3956.85,2275 ; 3956.85,2275 STEER1.2 3956.85,2275
SWCLK: LOAD1.1 U1.37 | length 325.7
  Top Layer w8: LOAD1.1 2901.85,2790 2971.85,2720 3021.85,2720 3043.55,2741.7 U1.37@3043.55,2772.7
SWDIO: LOAD1.2 U1.34 | length 205.5
  Top Layer w8: LOAD1.2 2881.85,2890 2900.75,2871.1 U1.34
TX: BLUETOOTH.4 U1.21 WIFI.1 | length 1059.3
  Top Layer w8: WIFI.1 2581.85,3310 2646.85,3245 2836.85,3245 2866.85,3215 3076.85,3215 3102.65,3189.2 U1.21
  Bottom Layer w8: BLUETOOTH.4 2261.85,3360 2511.85,3360 2521.85,3350 WIFI.1
U2_1: R14.1 U2.1 | length 118
  Top Layer w8: R14.1@2266.85,2780 v1@2267.15,2830
  Bottom Layer w8: U2.1 2199.45,2830 v1(2266.85,2830)
U2_3: R15.2 U2.3 U2.6 | length 290.4
  Top Layer w8: R15.2 2245.59,2984.66 v1(2271.85,2958.4)
  Bottom Layer w8: U2.3 2258.46,2881.61 2271.85,2895 v1(2271.85,2958.4) U2.6
U2_11: C17.1 U2.11 | length 207.1
  Top Layer w8: C17.1 v1(2341.85,3040)
  Bottom Layer w8: v1(2341.85,3040) 2341.85,2975 2358.46,2958.39 U2.11
U2_14: C19.1 U2.14 | length 124.7
  Top Layer w8: C19.1 2429.05,2860 2476.85,2860 v1(2476.85,2881.6)
  Bottom Layer w8: U2.14@2424.65,2881.6 v1(2476.85,2881.6)
U5_1: POWER_BATTERY1.2 U5.1
U9_2: Q1.3 U9.2 | length 85.7
  Bottom Layer w8: Q1.3 2728.64,3813.36 U9.2
U10_3: R14.2 U10.2 U10.3 | length 647.6
  Top Layer w8: U10.2 U10.3 2101.85,2353.4 2101.85,2725 2156.85,2780 R14.2@2207.15,2780
UP: C20.2 R22.1 SW2.2 U1.11 UP.1 | length 1357
  Top Layer w8: U1.11@3319.15,3028.6 3350.45,3028.6 3431.85,3110 3556.85,3110 3671.85,2995 3796.85,2995 3811.85,3010 3811.85,3155 v1(3911.85,3255) 3911.85,3300 UP.1@3909.25,3300
  Bottom Layer w8: v1(3911.85,3255) 3938.42,3228.43 SW2.2
  Bottom Layer w12: R22.1 3971.32,3301.91 C20.2 4076.85,3300 4092.36,3284.49 SW2.2
V1+: MOTOR1.1 U2.4 | length 219.9
  Bottom Layer w18: MOTOR1.1 2086.85,3005 2096.85,2995 2096.85,2940 2129.65,2907.2 U2.4
V1-: MOTOR1.6 U2.2 | length 442
  Bottom Layer w18: MOTOR1.6 2106.85,2560 2106.85,2815 2147.85,2856 U2.2
V2+: MOTOR2.1 U2.7 | length 814.5
  Bottom Layer w18: MOTOR2.1 2096.85,3690 2111.85,3675 2111.85,3180 2146.85,3145 2146.85,3000 2162.87,2983.98 U2.7
V2-: MOTOR2.6 U2.5 | length 345.8
  Bottom Layer w18: MOTOR2.6 2121.85,3120 2121.85,2962.8 2151.85,2932.8 U2.5
VH1-: D3.2 MOTOR3.2 U12.3
VH2-: D4.2 MOTOR3.4 U6.3
VH3-: D5.2 MOTOR4.4 U7.3
VH4-: D6.2 MOTOR4.2 U8.3
pads on no net: BLUETOOTH.5 BLUETOOTH.6 ENCODER1.5 ENCODER1.6 ENCODER2.5 ENCODER2.6 LS3.1@3491.85,3279.99 LS4.1@3741.85,3109.99 SW2. U2.8 U3.6 U4.6 U14.4 WIFI.3 WIFI.4 WIFI.5

## Polygon pours and split planes (outlines as drawn)
VH3- on Bottom Layer (solid): 2796.85,2150 2796.85,2295 2786.85,2305 2776.85,2305 2706.85,2305 2701.85,2310 2701.85,2335 2691.85,2345 2681.85,2345 2641.85,2345 2631.85,2335 2631.85,2285 2711.85,2205 2711.85,2150
VH4- on Bottom Layer (solid): 2711.85,2560 2791.85,2560 2826.85,2560 2851.85,2535 2851.85,2505 2826.85,2480 2736.85,2480 2706.85,2450 2706.85,2395 2686.85,2375 2636.85,2375 2621.85,2390 2621.85,2395 2621.85,2435 2621.85,2455
VH2- on Bottom Layer (solid): 2281.85,2330 2301.85,2350 2341.85,2350 2386.85,2305 2451.85,2305 2451.85,2255 2416.85,2220 2416.85,2150 2336.85,2150 2281.85,2205 2281.85,2225
VH1- on Bottom Layer (solid): 2351.85,2675 2366.85,2660 2366.85,2600 2396.85,2570 2416.85,2570 2416.85,2490 2361.85,2435 2361.85,2410 2361.85,2390 2346.85,2375 2291.85,2375 2276.85,2390 2276.85,2635 2276.85,2650 2301.85,2675
AGND on Bottom Layer (solid): 3351.85,3960 3356.85,3955 3356.85,3485 3361.85,3480 4231.85,3480 4241.85,3470 4241.85,3410 4246.85,3405 4426.85,3405 4506.85,3485 4506.85,3965
GND on Bottom Layer (solid): 1781.85,4140 1786.85,4135 4581.85,4135 4646.85,4070 4646.85,1560 4531.85,1675 1751.85,1675
4.2V on Top Layer (solid): 2736.85,2215 2941.85,2215 2951.85,2225 3011.85,2225 3011.85,2195 3011.85,2185 2966.85,2185 2966.85,2160 2961.85,2155 2736.85,2155
4.2V on Top Layer (solid): 3561.85,2015 3556.85,2020 3556.85,2250 3516.85,2250 3516.85,2300 3481.85,2300 3481.85,2190 3501.85,2170 3501.85,2020
D1_2 on Top Layer (solid): 3521.85,2405 3581.85,2405 3581.85,2355 3731.85,2355 3751.85,2375 3751.85,2435 3756.85,2435 3831.85,2435 3831.85,2355 3801.85,2325 3801.85,2200 3666.85,2200 3661.85,2205 3661.85,2280 3641.85,2300 3521.85,2300
R8_1 on Top Layer (solid): 2966.85,2335 3071.85,2335 3071.85,2305 3116.85,2260 3116.85,2235 3071.85,2235 3031.85,2275 2966.85,2275
R9_2 on Top Layer (solid): 3011.85,2225 3011.85,2265 3011.85,2225 2951.85,2225 2941.85,2215 2906.85,2215 2906.85,2265 3011.85,2265
5V_ADJ on Top Layer (solid): 3046.85,2455 3046.85,2365 2956.85,2365 2956.85,2295 2881.85,2295 2886.85,2300 2886.85,2425 2916.85,2455 2991.85,2455
R6_2 on Top Layer (solid): 3471.85,2300 3471.85,2185 3421.85,2185 3421.85,2225 3446.85,2250 3446.85,2300
R5_1 on Top Layer (solid): 3446.85,2360 3481.85,2360 3481.85,2465 3376.85,2465 3376.85,2420 3436.85,2360 3446.85,2360
5V on Top Layer (solid): 3571.85,2530 3636.85,2530 3636.85,2470 3656.85,2445 3656.85,2355 3576.85,2355 3576.85,2405 3556.85,2425 3501.85,2425 3501.85,2465
D2_2 on Top Layer (solid): 3136.85,2450 3216.85,2450 3216.85,2370 3296.85,2290 3326.85,2290 3326.85,2205 3266.85,2150 3071.85,2150 3071.85,2185 3116.85,2185 3136.85,2205 3136.85,2450
U5_1 on Top Layer (solid): 2736.85,2085 2971.85,2085 2971.85,1995 2966.85,1990 2736.85,1990
AGND on Top Layer (solid): 3351.85,3960 3356.85,3955 3356.85,3485 3361.85,3480 4231.85,3480 4241.85,3470 4241.85,3410 4246.85,3405 4426.85,3405 4506.85,3485 4506.85,3965
GND on Top Layer (solid): 1751.85,4080 1756.85,4075 4551.85,4075 4616.85,4010 4616.85,1500 4501.85,1615 1721.85,1615

## Keep-outs
Keep-Out Layer:
  lines w10: 1970.75,2034.49 ccw(c2049.49,2034.49) 2049.49,1955.75 ; 1970.75,3845.51 cw(c2049.49,3845.51) 2049.49,3924.25 ; 4254.21,1955.75 ccw(c4254.21,2034.49) 4332.95,2034.49 ; 4254.21,3924.25 cw(c4254.21,3845.51) 4332.95,3845.51

## Silkscreen, mask and mechanical layers (free items; w line width, h text height)
Top Overlay:
  text "DI0" at 3041.85,3875 h20 r270
  text "GND" at 2881.85,3870 h20 r270
  text "GND" at 3201.85,3870 h20 r270
  text "AGND" at 3576.85,3870 h20 r270
  text "AGND" at 3811.85,3870 h20 r270
  text "AGND" at 4051.85,3870 h20 r270
  text "AGND" at 4286.85,3870 h20 r270
  text "GND" at 3041.85,3780 h20 r270
  text "SDA" at 2021.85,3770 h20
  text "CLK" at 2121.85,3770 h20
  text "3.3V" at 2226.85,3770 h20
  text "DI2" at 2881.85,3770 h20 r270
  text "GND" at 2322.32,3769.45 h20
  text "DI0" at 3201.85,3760 h20 r270
  text "V2+" at 2106.85,3680 h20 r270
  text "5V" at 2281.85,3680 h20 r270
  text "5V" at 3041.85,3670 h20 r270
  text "DI1" at 3201.85,3665 h20 r270
  text "5V" at 2881.85,3660 h20 r270
  text "GND" at 2571.85,3640 h20 r270
  text "RX" at 2331.85,3630 h20 r270
  text "GND" at 2281.85,3620 h20 r270
  text "5V" at 2101.85,3605 h20 r270
  text "GND" at 2691.85,3580 h20
  text "5V" at 2801.85,3580 h20
  text "GND" at 2881.85,3560 h20 r270
  text "DI2" at 3201.85,3560 h20 r270
  text "DI1" at 3041.85,3550 h20 r270
  text "QA2" at 2101.85,3520 h20 r270
  text "RX" at 2281.85,3517.15 h20 r270
  text "DI3" at 3201.85,3465 h20 r270
  text "DI3" at 2881.85,3460 h20 r270
  text "GND" at 3041.85,3455 h20 r270
  text "QA2" at 2626.85,3450 h20 r270
  text "5V" at 3681.85,3430 h20
  text "ADC0" at 3761.85,3430 h20
  text "ADC1" at 3861.85,3430 h20
  text "ADC2" at 3961.85,3430 h20
  text "ADC3" at 4061.85,3430 h20
  text "GND" at 4171.85,3430 h20
  text "QB2" at 2101.85,3417.15 h20 r270
  text "TX" at 2281.85,3416.41 h20 r270
  text "5V" at 2881.85,3350 h20 r270
  text "5V" at 3041.85,3345 h20 r270
  text "3.3V" at 2331.85,3335 h20 r270
  text "TX" at 2571.85,3325 h20 r270
  text "GND" at 2101.85,3316.41 h20 r270
  text "5V" at 3201.85,3310 h20 r270
  text "V2-" at 2101.85,3215 h20 r270
  text "5V" at 2616.85,3195 h20 r270
  text "3.3V" at 2836.85,3125 h20 r270
  text "m1" at 2616.85,3100 h20 r270
  text "GND" at 2836.85,3020 h20 r270
  text "m2" at 2616.85,3005 h20 r270
  text "V1+" at 2101.85,2995 h20 r270
  text "DIO" at 2836.85,2925 h20 r270
  text "5V" at 2101.85,2918.59 h20 r270
  text "m3" at 2616.85,2905 h20 r270
  text "QA1" at 2101.85,2833.59 h20 r270
  text "CLK" at 2836.85,2815 h20 r270
  text "m4" at 2617,2808.26 h20 r280
  text "QB1" at 3641.85,2760 h20 r90
  text "QA1" at 3876.85,2760 h20 r90
  text "QB1" at 2101.85,2730.74 h20 r270
  text "GND" at 3381.85,2730 h20
  text "GND" at 3481.85,2730 h20
  text "5V" at 2551.85,2680 h20
  text "PWM1" at 2636.85,2680 h20
  text "PWM2" at 2731.85,2680 h20
  text "PWM3" at 2831.85,2680 h20
  text "PWM4" at 2926.85,2680 h20
  text "GND" at 2101.85,2630 h20 r270
  text "5V" at 3676.85,2585 h20
  text "GND" at 3766.85,2585 h20
  text "5V" at 3596.85,2560 h20 r90
  text "3.3V" at 3356.85,2550 h20 r90
  text "V1-" at 2101.85,2528.59 h20 r270
  text "VH1-" at 2361.85,2450 h20 r270
  text "VH4-" at 2716.85,2445 h20 r270
  text "VH2-" at 2361.85,2345 h20 r270
  text "VH3-" at 2726.85,2300 h20
  text "STR2" at 3971.85,2240 h20 r90
  text "4.2V" at 2161.85,2220 h20
  text "5V_ADJ" at 2516.85,2220 h20
  text "电源" at 2496.85,2140 h40 r359
  text "开" at 2851.85,2105 h40 r90
  text "+" at 2921.85,2095 h40 r223
  text "-" at 3026.85,2095 h40 r90
  text "STR1" at 4001.85,2085 h20
  text "5V" at 4116.85,2085 h20
  text "GND" at 4206.85,2085 h20
  text "开" at 2101.85,2010 h40 r90
  text "电机" at 1991.85,2005 h40
  text "SDA" at 3921.85,1955 h20
  text "SCL" at 4016.85,1955 h20
  text "GND" at 4116.85,1955 h20
  text "5V" at 4221.85,1955 h20

## Text inside footprints (layer, text, board x,y; h text height)
OLED1: Top Overlay "IIC-Connector" at 2423.45,4297.06 h47.24 r180; Top Overlay "0.96'OLED" at 2354.25,4208.57 h47.24 r180